# EAGLE board Wheel_Encoder_Adapter_Schmitt (EAGLE 5.11)
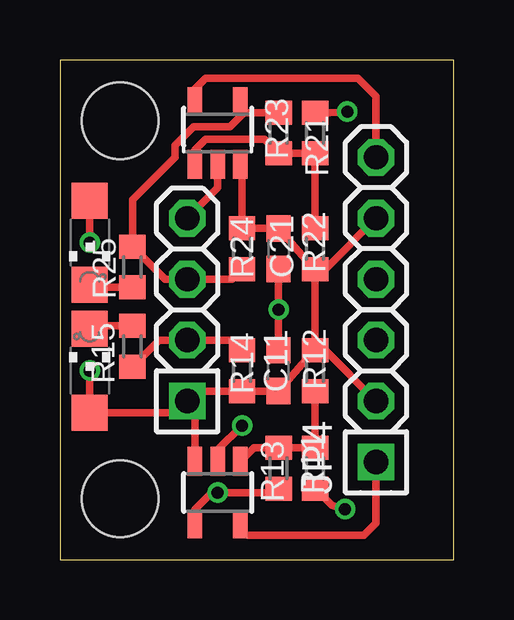
[diagram p0: board, top side]
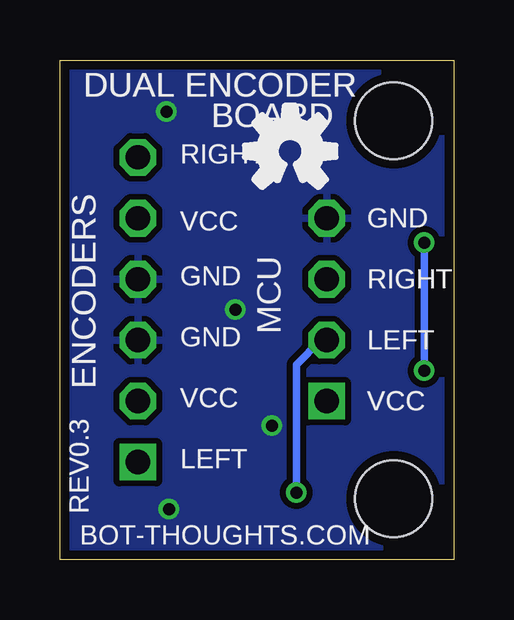
[diagram p1: board, bottom side, seen from below]

Size 16.43 x 20.82 mm. Coordinates in mm from the lower left corner, seen from the top.
Outline: 0,0 16.43,0 16.43,20.82 0,20.82 0,0
Copper layers (1*16): Top 0.0356mm / dielectric 1.5011mm / Bottom 0.0356mm
Design rules "LaenPCBOrder": minimum track width 6mil, minimum drill 13mil, track to track 6mil, track to pad 6mil, pad to pad 6mil, via to via 6mil, smd to smd 6mil, copper to edge 15mil, drill to drill 6mil, minimum pad ring 7mil, minimum via ring 7mil, stop-mask expansion 4mil, vias tented up to drill 0mil, thermal gap 10mil
Holes 3.2 mm at 2.51,18.29 2.51,2.54

## Footprints (pad centres in the part's own frame; a part is rotated, then mirrored left to right if it is on the bottom)
C0603 = smd 1.1 x 1: 1 -0.85,0; 2 0.85,0
DBV-R-PDSO-G5 = smd 0.6 x 1.2: 1 -0.95,-1.306; 2 0,-1.306; 3 0.95,-1.306; 4 0.95,1.306; 5 -0.95,1.306
1X04-S = drill 1.016 square: 1 -3.81,0 | drill 1.016 octagon: 2 -1.27,0; 3 1.27,0; 4 3.81,0
1X06-S = drill 1.016 square: 1 -6.35,0 | drill 1.016 octagon: 2 -3.81,0; 3 -1.27,0; 4 1.27,0; 5 3.81,0; 6 6.35,0
CHIPLED_1206 = smd 1.5 x 1.5: A 0,-1.75; C 0,1.75
R0603 = smd 1 x 1.1: 1 -0.85,0; 2 0.85,0

## Placement (x,y rotation side)
C11  1uF  [C0603]  9.12,7.87 90 top
C21  1uF  [C0603]  9.12,12.95 270 top
IC1  TL331  [DBV-R-PDSO-G5]  6.58,2.79 180 top
IC2  TL331  [DBV-R-PDSO-G5]  6.58,17.78 0 top
JP3  MCU  [1X04-S]  5.31,10.41 90 top
JP4  ENCODERS  [1X06-S]  13.18,10.41 90 top
LED1  LEFT  [CHIPLED_1206]  1.24,7.87 0 top
LED2  RIGHT  [CHIPLED_1206]  1.24,13.21 180 top
R11  12K  [R0603]  10.64,3.81 90 top
R12  56K  [R0603]  10.64,7.87 90 top
R13  51K  [R0603]  9.12,3.81 270 top
R14  10K  [R0603]  7.59,7.87 270 top
R15  330  [R0603]  3.02,8.89 270 top
R21  12K  [R0603]  10.64,17.78 270 top
R22  56K  [R0603]  10.64,12.95 270 top
R23  51K  [R0603]  9.12,17.78 90 top
R24  10K  [R0603]  7.59,12.95 90 top
R25  330  [R0603]  3.02,12.19 90 top

## Library data of the parts
C11 C21 = rcl; BOM: INCLUDE; PARTNO: C1608X7R1A105M
IC1 IC2 = linear; BOM: INCLUDE; PARTNO: TL331IDBVR
JP3 JP4 = pinhead-2; BOM: EXCLUDE
LED1 LED2 = led; BOM: INCLUDE; PARTNO: LG N971-KN-1
R11 R21 = resistor; PARTNO: ERJ-3EKF1202V
R12 R22 = resistor; PARTNO: ERJ-3EKF5602V
R13 R23 = resistor; PARTNO: ERJ-3EKF5102V
R14 R24 = resistor; PARTNO: ERJ-3GEYJ103V
R15 R25 = resistor; PARTNO: ERJ-3GEYJ331V

## Nets
GND: C11.2 C21.2 IC1.2 IC2.2 JP3.4 JP4.3 JP4.4 R11.1 R21.1
IN_LEFT: IC1.5 JP4.1
IN_RIGHT: IC2.5 JP4.6
N$1: LED1.C R15.1
N$2: IC1.1 R11.2 R12.1 R13.1
N$3: LED2.C R25.1
N$7: IC2.1 R21.2 R22.1 R23.1
OUT_LEFT: IC1.4 JP3.2 R13.2 R14.1 R15.2
OUT_RIGHT: IC2.4 JP3.3 R23.2 R24.1 R25.2
VCC: C11.1 C21.1 IC1.3 IC2.3 JP3.1 JP4.2 JP4.5 LED1.A LED2.A R12.2 R14.2 R22.2 R24.2

## Tracks (layer width: path | path; a pad name or v marks a point on that pad's centre or on a via)
GND  (via drill 0.5)
  Top 0.305: IC1.2 6.58,4.57 v7.59,5.59 | C11.2 v9.12,10.41 C21.2 | R11.1 11.34,2.27 v11.89,2.11 | IC2.2 6.58,15.49 JP3.4 | R21.1 11.24,18.63 v11.99,18.67
  pour Bottom (isolate 0.254): -0.25,-0.25 -0.25,21.34 16.89,21.34 16.89,-0.25
IN_LEFT
  Top 0.305: IC1.5 7.53,1.08 7.85,1.02 12.67,1.02 13.18,1.52 JP4.1
IN_RIGHT
  Top 0.305: IC2.5 5.63,19.62 6.07,20.07 12.42,20.07 13.18,19.3 JP4.6
N$1
  Top 0.305: R15.1 1.36,9.74 LED1.C
N$2
  Top 0.305: R12.1 R11.2 R13.1 8.09,4.66 IC1.1
N$3
  Top 0.305: R25.1 1.36,11.34 LED2.C
N$7
  Top 0.305: R22.1 R21.2 R23.1 8.52,17.53 6.07,17.53 5.63,17.08 IC2.1
OUT_LEFT  (via drill 0.5)
  Top 0.305: R15.2 4.13,9.14 JP3.2 7.17,9.14 R14.1 | IC1.4 5.63,1.59 5.63,2.1 6.32,2.79 v6.58,2.79 8.95,2.79 R13.2
  Bottom 0.305: JP3.2 5.56,9.14 6.58,8.13 v6.58,2.79
OUT_RIGHT
  Top 0.305: R24.1 7.17,11.68 JP3.3 4.38,11.68 R25.2 3.02,14.99 4.8,16.76 4.8,17.27 5.56,18.03 7.09,18.03 7.53,18.48 | 7.53,18.48 IC2.4 | R23.2 7.68,18.63 7.53,18.48
VCC  (via drill 0.5)
  Top 0.305: JP3.1 4.83,6.12 LED1.A v1.24,7.87 | v1.24,13.21 LED2.A | IC1.3 5.63,6.28 JP3.1 | JP3.1 5.65,7.02 R14.2 C11.1 10.39,8.47 R12.2 | R12.2 11.06,8.72 JP4.2 | R12.2 R22.2 | R22.2 11.06,12.1 JP4.5 | IC2.3 7.59,16.41 R24.2 C21.1 10.39,12.36 R22.2
  Bottom 0.305: v1.24,7.87 v1.24,13.21

## Text on the board
bNames: DUAL ENCODER | BOARD | RIGHT | GND | VCC | RIGHT | GND | LEFT | GND | ENCODERS | VCC | VCC | LEFT | REV0.3 | BOT-THOUGHTS.COM
_bsilk: DUAL ENCODER | BOARD | RIGHT | GND | VCC | RIGHT | GND | LEFT | MCU | GND | ENCODERS | VCC | VCC | LEFT | REV0.3 | BOT-THOUGHTS.COM